# Altium PCB 4x4.PcbDoc
Units mm, origin at the board's own origin, x right, y up, seen from the top; angles counter-clockwise.
Board outline 74.01 x 80.38 mm, 2 copper layers (Top Layer, Bottom Layer); 18 components, 18 nets, 140 pads, 5 vias.
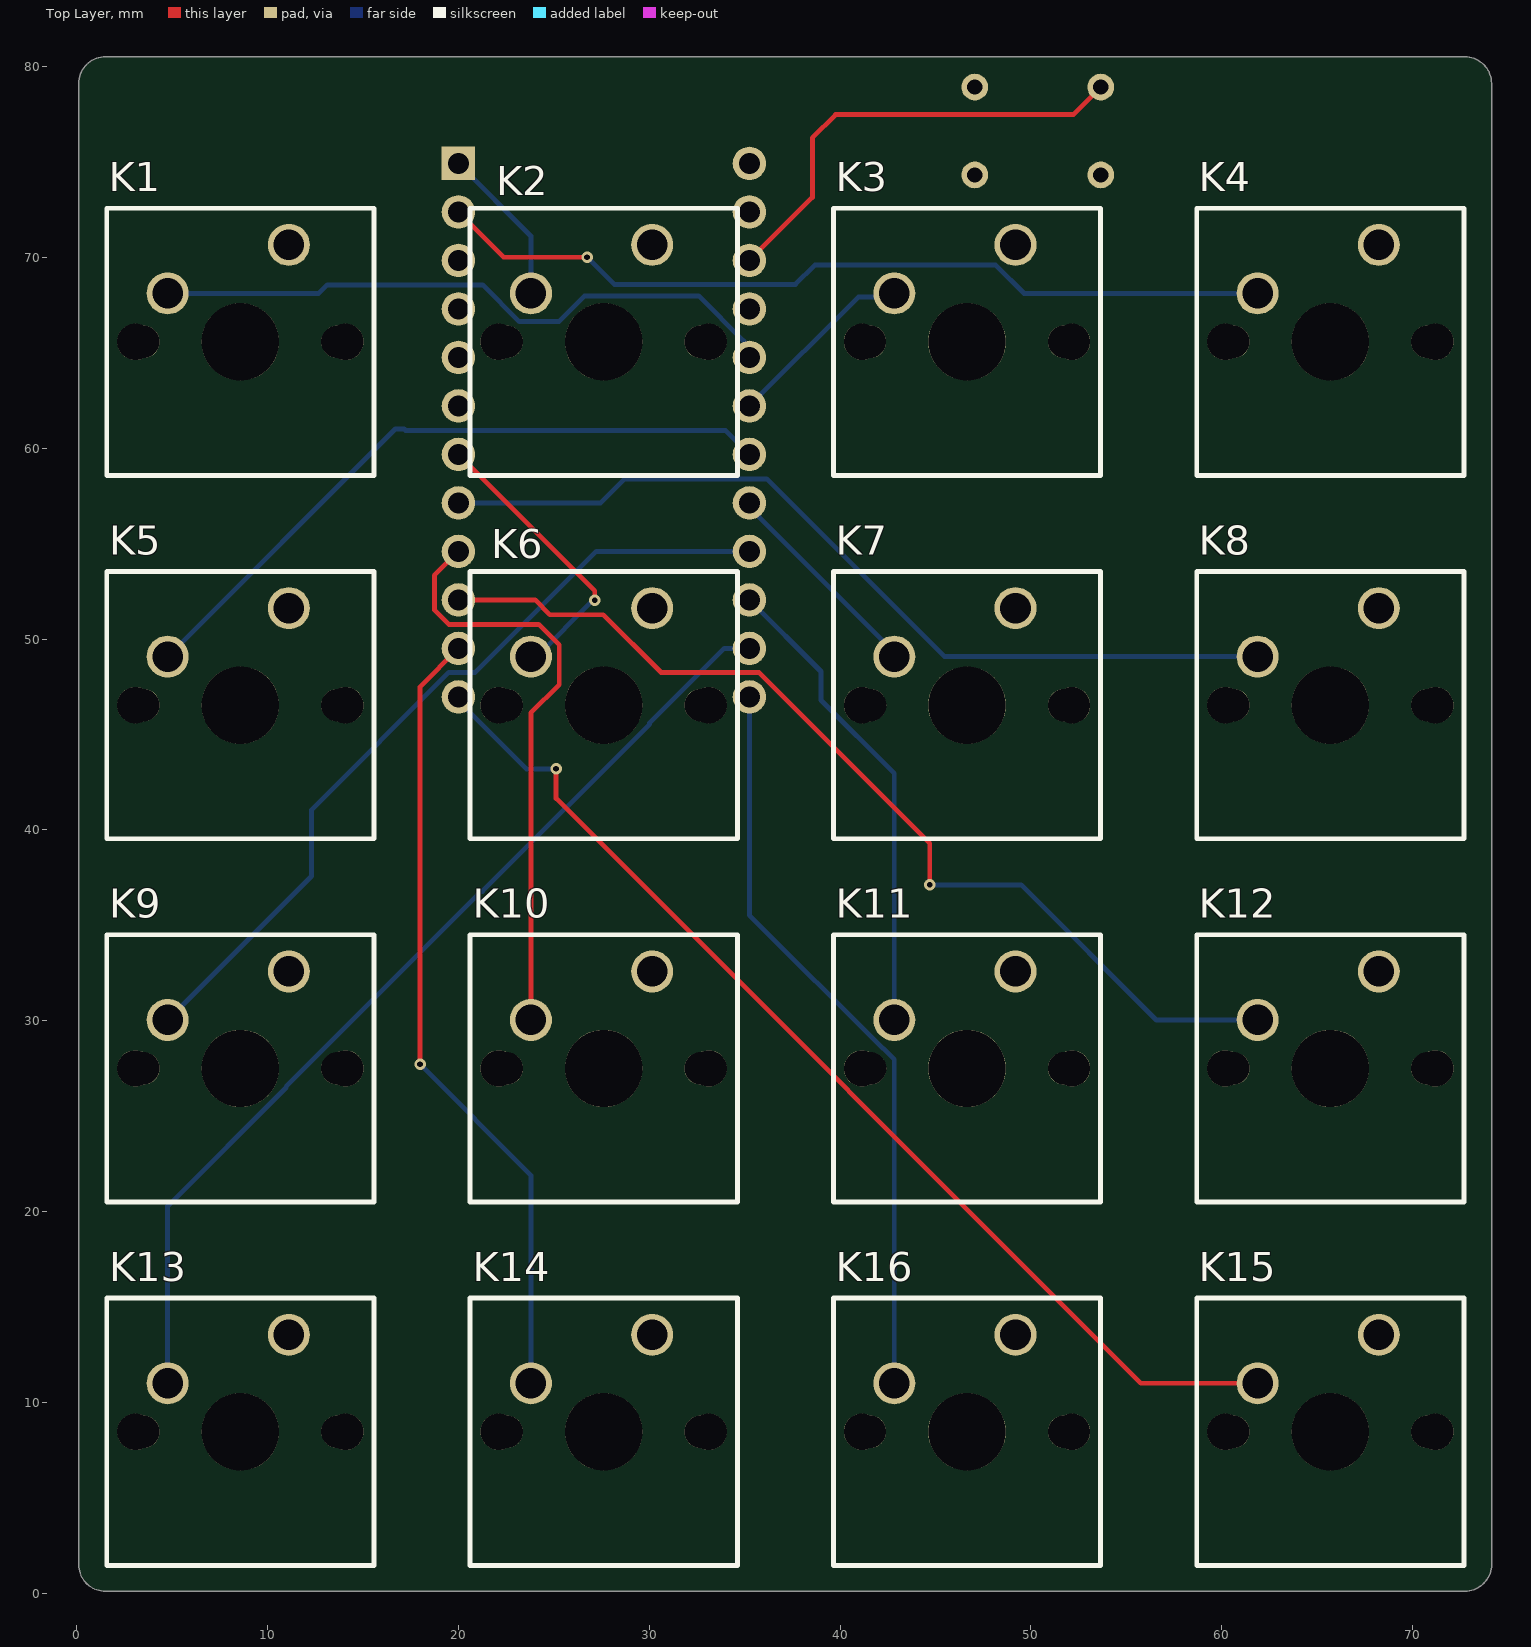
[diagram p0: Top Layer view]
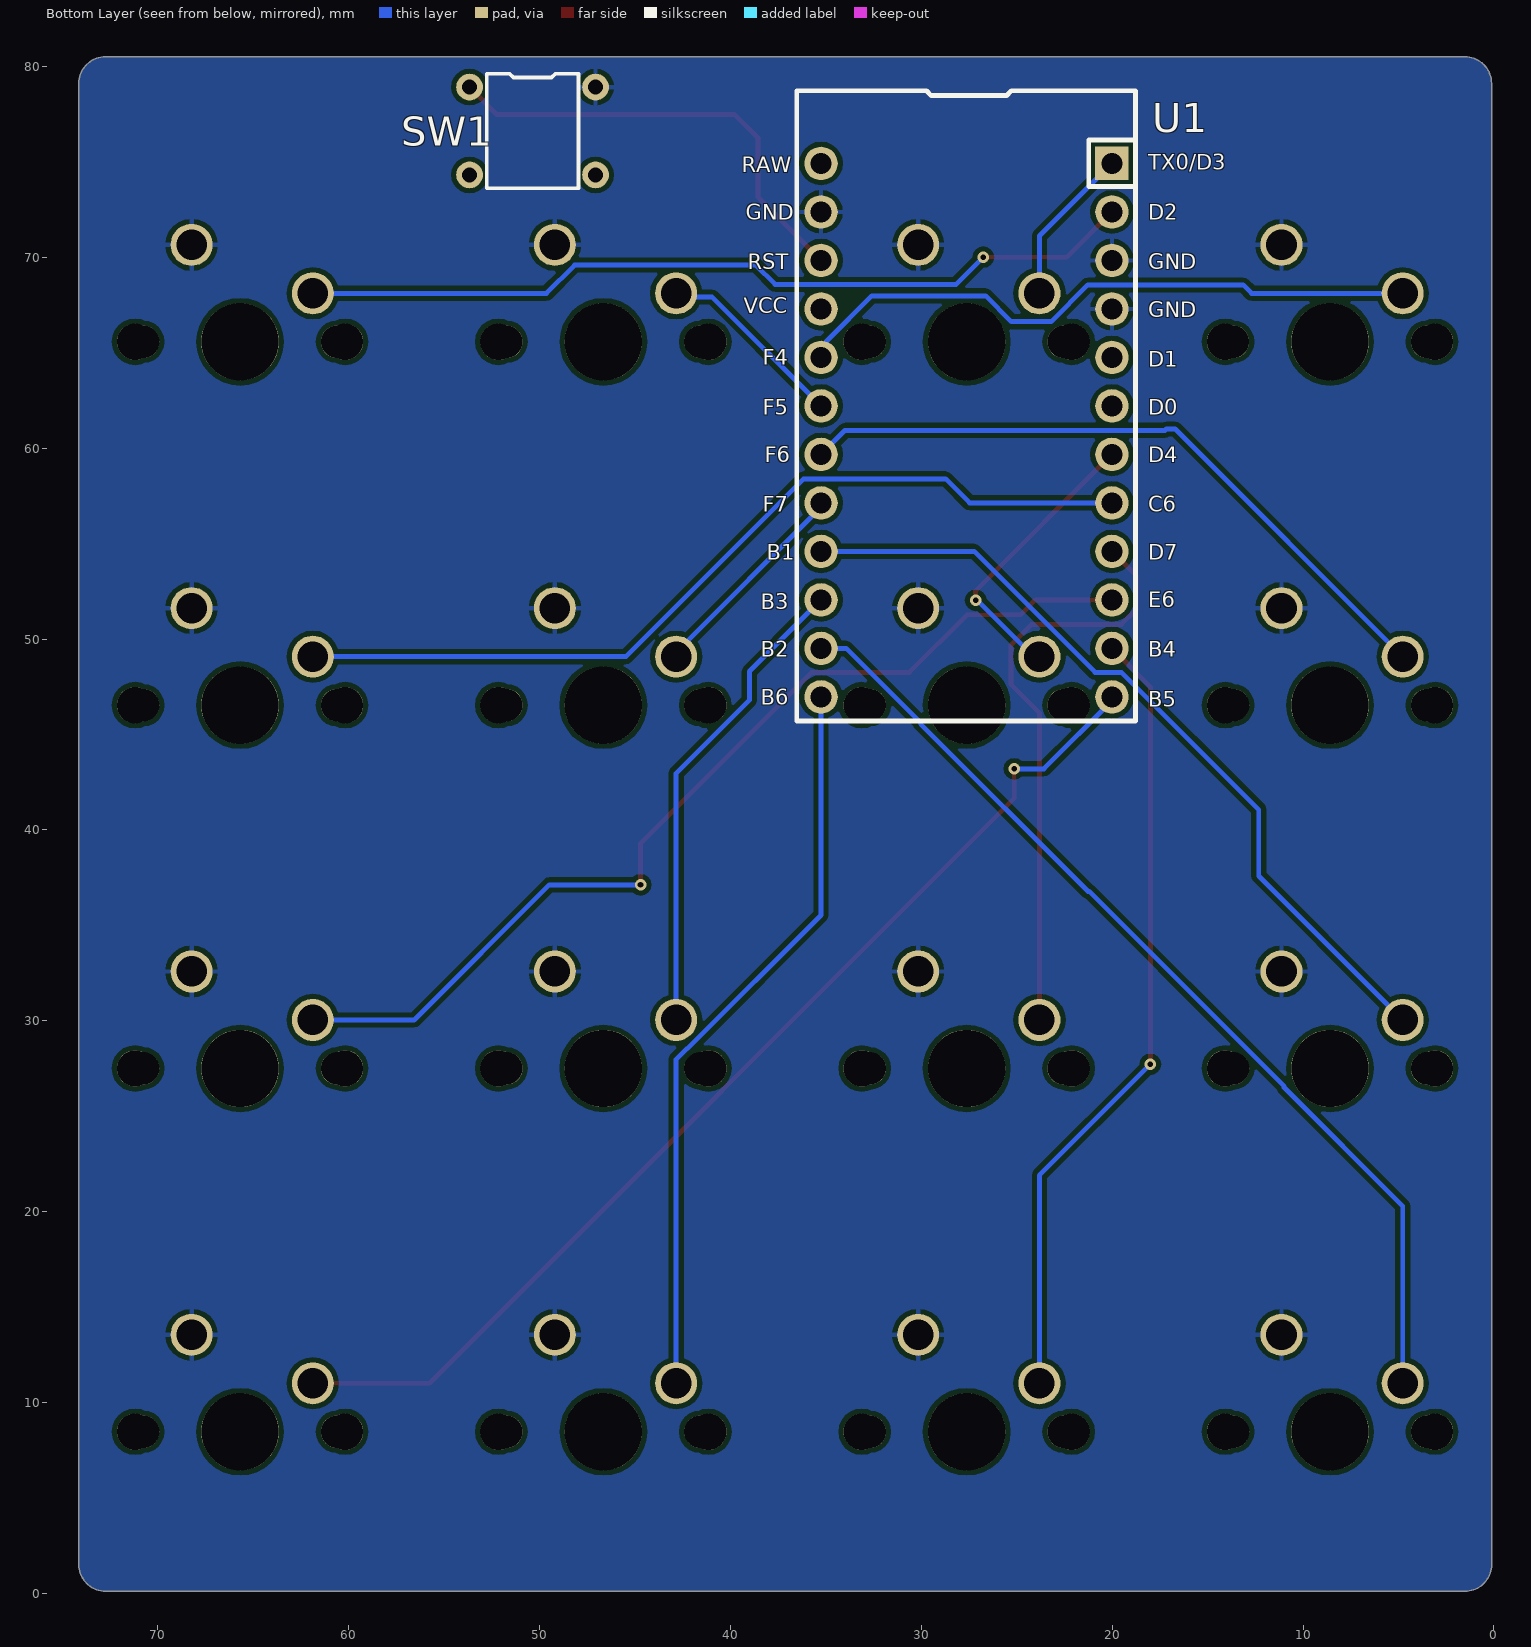
[diagram p1: Bottom Layer view, seen from below]

## Layer stack, top to bottom
Top Solder: solder mask 0.0102, Solder Resist, Dk 3.5
Top Layer: signal copper 0.0356
Dielectric 1: dielectric 0.32, FR-4, Dk 4.8
Bottom Layer: signal copper 0.0356
Bottom Solder: solder mask 0.0102, Solder Resist, Dk 3.5

## Board outline
1.522,0.122 cw(c1.522,1.522) 0.122,1.522 0.127,1.522 0.125,79.1 0.127,79.1 cw(c1.528,79.1) 1.528,80.501 1.529,80.5 72.722,80.5 72.728,80.497 cw(c72.728,79.1) 74.125,79.1 74.131,79.125 74.131,1.5 74.131,1.535 cw(c72.723,1.535) 72.723,0.126 72.725,0.127

## Design rules (kind name [scope] priority, off if disabled: settings)
Clearance [All] p1: gap=0.254 ignorepadtopadclearanceinfootprint=FALSE except(0: Arc-Hole Track-Hole SMDPad-Hole THPad-Hole Via-Hole Fill-Hole Poly-Hole Region-Hole Text-Hole)
PolygonConnect [All] p1: connectstyle=Relief reliefconductorwidth=0.254 reliefentries=4 polygonreliefangle="90 Angle" airgapwidth=0.254
RoutingVias [All] p1: holewidth=0.711 width=1.27 viastyle="Through Hole" minholewidth=0.711 minwidth=1.27 maxholewidth=0.711 maxwidth=1.27
SolderMaskExpansion [All] p1: expansion=0.102 istentingtop=FALSE
Width [All] p1: maxlimit=0.254 minlimit=0.254 preferedwidth=0.254
30 further rules are at their usual default settings.

## Components (designator, comment, footprint, x,y, rotation, side; value= is the part's Value field where it differs from the comment)
K1 "KEYSW-canadian_parts" Socket 1.54,58.567 r0 top
K2 "KEYSW-canadian_parts" Socket 20.57,58.567 r0 top
K3 "KEYSW-canadian_parts" Socket 39.599,58.567 r0 top
K4 "KEYSW-canadian_parts" Socket 58.629,58.567 r0 top
K5 "KEYSW-canadian_parts" Socket 1.539,39.537 r0 top
K6 "KEYSW-canadian_parts" Socket 20.569,39.537 r0 top
K7 "KEYSW-canadian_parts" Socket 39.6,39.537 r0 top
K8 "KEYSW-canadian_parts" Socket 58.629,39.537 r0 top
K9 "KEYSW-canadian_parts" Socket 1.539,20.507 r0 top
K10 "KEYSW-canadian_parts" Socket 20.57,20.507 r0 top
K11 "KEYSW-canadian_parts" Socket 39.6,20.507 r0 top
K12 "KEYSW-canadian_parts" Socket 58.629,20.507 r0 top
K13 "KEYSW-canadian_parts" Socket 1.539,1.477 r0 top
K14 "KEYSW-canadian_parts" Socket 20.569,1.477 r0 top
K15 "KEYSW-canadian_parts" Socket 58.629,1.477 r0 top
K16 "KEYSW-canadian_parts" Socket 39.599,1.477 r0 top
SW1 "SW_Push" RESET 52.16,73.21 r90 bottom
U1 "ProMicro-keebio" PRO-MICRO 35.25,74.91 r180 bottom

## Footprints (in the part's own frame and the unit in brackets; to place one, negate y for a bottom-side part, rotate by r counter-clockwise, add the part's x,y. Pads: shape width x height; smd on the part's side, far side on the other; paste and mask are expansions set on the pad)
PRO-MICRO [mm]
  rect 1.753x1.753 hole 1.092: 1(15.24,0)
  round 1.753 hole 1.092: 2(15.24,-2.54) 3(15.24,-5.08) 4(15.24,-7.62) 5(15.24,-10.16) 6(15.24,-12.7) 7(15.24,-15.24) 8(15.24,-17.78) 9(15.24,-20.32) 10(15.24,-22.86) 11(15.24,-25.4) 12(15.24,-27.94) 13(0,-27.94) 14(0,-25.4) 15(0,-22.86) 16(0,-20.32) 17(0,-17.78) 18(0,-15.24) 19(0,-12.7) 20(0,-10.16) 21(0,-7.62) 22(0,-5.08) 23(0,-2.54) 24(0,0)
  silkscreen extent -1.27,-29.21 16.48,3.81
RESET [mm]
  round 1.4 hole 0.8: 1(5.7,1.5) 2(5.7,-5.1) 3(1.1,1.5) 4(1.1,-5.1)
  silkscreen extent 0.4,-4.2 6.4,0.6
Socket [mm]
  round 2.2 hole 1.6: 1(3.24,9.54) 2(9.59,12.08)
  round 1.9 hole 1.9: 3(1.55,7) 3(12.55,7)
  round 1.7 hole 1.7: 3(1.97,7) 3(12.13,7)
  round 4.05 hole 4.05: 3(7.05,7)
  silkscreen extent 0.05,0 14.05,14

## Via types
v1: diameter 0.6, hole 0.3, Top Layer to Bottom Layer, 5 vias

## Nets (pads, with @x,y where several pads share a name; then routed paths per layer and width w, separated by ;. In a path a pad name is that pad's centre, name@x,y a point inside that pad or via, vN(x,y) a via of type N, cw(c..) or ccw(c..) an arc to the next point about the centre after c; other vN are vias at no path point)
B1: K9.1 U1.16 | length 42.7
  Bottom Layer w0.254: K9.1 12.32,37.588 12.32,41.059 19.514,48.252 20.891,48.252 27.228,54.59 U1.16
B2: K13.1 U1.14 | length 51.9
  Bottom Layer w0.254: K13.1 4.78,20.294 10.995,26.51 10.995,26.574 21.2,36.779 21.264,36.779 30.026,45.54 30.026,45.604 33.932,49.51 U1.14
B3: K11.1 U1.15 | length 25.1
  Bottom Layer w0.254: U1.15 39.002,48.298 39.002,46.802 42.84,42.965 K11.1
B4: K14.1 U1.11 | length 41.7
  Top Layer w0.254: v1(18,27.725) 18,47.5 U1.11
  Bottom Layer w0.254: v1(18,27.725) 23.81,21.915 K14.1
B5: K15.1 U1.12 | length 57.8
  Top Layer w0.254: v1(25.125,43.2) 25.125,41.649 55.757,11.017 K15.1
  Bottom Layer w0.254: U1.12 20.01,46.764 23.574,43.2 v1(25.125,43.2)
B6: K16.1 U1.13 | length 39.1
  Bottom Layer w0.254: U1.13 35.25,35.542 42.226,28.566 42.252,28.566 42.84,27.978 K16.1
C6: K8.1 U1.8 | length 46.2
  Bottom Layer w0.254: U1.8 27.465,57.13 28.722,58.388 36.163,58.388 45.473,49.077 K8.1
D2: K4.1 U1.2 | length 44.5
  Top Layer w0.254: U1.2 22.38,70 v1(26.75,70)
  Bottom Layer w0.254: v1(26.75,70) 28.178,68.572 37.658,68.572 38.674,69.588 48.154,69.588 49.635,68.107 K4.1
D3: K2.1 U1.1 | length 8.4
  Bottom Layer w0.254: U1.1 23.81,71.11 K2.1
D4: K6.1 U1.7 | length 15.2
  Top Layer w0.254: U1.7 27.15,52.53 v1(27.15,52.025)
  Bottom Layer w0.254: K6.1 24.108,49.077 27.056,52.025 v1(27.15,52.025)
D7: K10.1 U1.9 | length 31.1
  Top Layer w0.254: U1.9 18.752,53.332 18.752,51.529 19.514,50.768 24.213,50.768 25.291,49.69 25.291,47.611 23.81,46.13 K10.1
E6: K12.1 U1.10 | length 52.2
  Top Layer w0.254: U1.10 24.024,52.05 24.799,51.275 27.6,51.275 30.623,48.252 35.746,48.252 44.7,39.298 v1(44.7,37.125)
  Bottom Layer w0.254: v1(44.7,37.125) 49.482,37.125 56.56,30.047 K12.1
F4: K1.1 U1.20 | length 33.7
  Bottom Layer w0.254: K1.1 12.698,68.107 13.139,68.548 21.275,68.548 23.196,66.626 25.276,66.626 26.623,67.973 32.596,67.973 34.963,65.606 34.963,65.037 U1.20
F5: K3.1 U1.19 | length 10
  Bottom Layer w0.254: U1.19 40.953,67.913 42.645,67.913 K3.1
F6: K5.1 U1.18 | length 36
  Bottom Layer w0.254: K5.1 16.702,61 17.16,61 17.232,60.928 33.992,60.928 U1.18
F7: K7.1 U1.17 | length 11.2
  Bottom Layer w0.254: U1.17 35.25,56.898 42.84,49.309 K7.1
GND: K1.2 K2.2 K3.2 K4.2 K5.2 K6.2 K7.2 K8.2 K9.2 K10.2 K11.2 K12.2 K13.2 K14.2 K15.2 K16.2 SW1.2 U1.3 U1.4 U1.23
NetSW1_1: SW1.1 U1.22 | length 24
  Top Layer w0.254: U1.22 38.55,73.13 38.55,76.251 39.77,77.471 52.221,77.471 SW1.1
pads on no net: K1.3 K2.3 K3.3 K4.3 K5.3 K6.3 K7.3 K8.3 K9.3 K10.3 K11.3 K12.3 K13.3 K14.3 K15.3 K16.3 SW1.3 SW1.4 U1.5 U1.6 U1.21 U1.24

## Polygon pours and split planes (outlines as drawn)
no net on Top Layer "NONET_L01_P015" (solid, pour order 15): 148.25,129.75
no net on Top Layer "NONET_L01_P013" (solid, pour order 13): 114.25,132.75
GND on Bottom Layer "GND_L02_P017" (solid, pour order 17): 0.125,79.1 cw(c1.525,79.1) 1.525,80.5 72.725,80.5 cw(c72.725,79.1) 74.125,79.1 74.125,1.525 cw(c72.725,1.525) 72.725,0.125 1.475,0.125 cw(c1.475,1.475) 0.125,1.475
no net on Bottom Layer "NONET_L02_P016" (solid, pour order 16): 8.3,80.5

## Other copper
Top Layer:
  region: 146.878,207.896

## Silkscreen, mask and mechanical layers (free items; w line width, h text height)
Mechanical 1:
  lines w0.254: 0.122,1.522 ccw(c1.522,1.522) 1.522,0.122 ; 0.125,79.1 0.127,1.522 ; 0.127,79.1 cw(c1.528,79.1) 1.528,80.501 ; 1.522,0.127 72.725,0.127 ; 1.529,80.5 72.722,80.5 ; 72.723,0.126 ccw(c72.723,1.535) 74.131,1.535 ; 72.728,80.497 cw(c72.728,79.1) 74.125,79.1 ; 74.131,1.5 74.131,79.125

## Text inside footprints (layer, text, board x,y; h text height)
U1: Bottom Overlay "F6" at 38.2,59.26 h0.8; Bottom Overlay "GND" at 18.1,69.36 h0.8; Bottom Overlay "RAW" at 39.4,74.46 h0.8; Bottom Overlay "GND" at 39.2,71.96 h0.8; Bottom Overlay "RST" at 39.1,69.36 h0.8; Bottom Overlay "VCC" at 39.3,67.06 h0.8; Bottom Overlay "F4" at 38.3,64.36 h0.8; Bottom Overlay "F5" at 38.3,61.76 h0.8; Bottom Overlay "F7" at 38.3,56.66 h0.8; Bottom Overlay "B1" at 38.1,54.16 h0.8; Bottom Overlay "B3" at 38.4,51.56 h0.8; Bottom Overlay "B2" at 38.4,49.06 h0.8; Bottom Overlay "B6" at 38.4,46.56 h0.8; Bottom Overlay "D2" at 18.1,71.96 h0.8; Bottom Overlay "GND" at 18.1,66.86 h0.8; Bottom Overlay "D1" at 18.1,64.26 h0.8; Bottom Overlay "D0" at 18.1,61.76 h0.8; Bottom Overlay "D4" at 18.1,59.26 h0.8; Bottom Overlay "C6" at 18.1,56.66 h0.8; Bottom Overlay "D7" at 18.1,54.16 h0.8; Bottom Overlay "TX0/D3" at 18.1,74.574 h0.8; Bottom Overlay "E6" at 18.1,51.66 h0.8; Bottom Overlay "B4" at 18.1,49.06 h0.8; Bottom Overlay "B5" at 18.1,46.46 h0.8